# Altium PCB MCU_FOR_DOWNLOAD_V6_8_PCS.PcbDoc (part 4 of 4)
Units mil, origin at the board's own origin, x right, y up, seen from the top; angles counter-clockwise.
Board outline 4834.06 x 3482.15 mil, 4 copper layers (Top, GND1, GND2, Bottom), stack 35.4 mil thick; 280 components, 38 nets, 1144 pads, 944 vias.
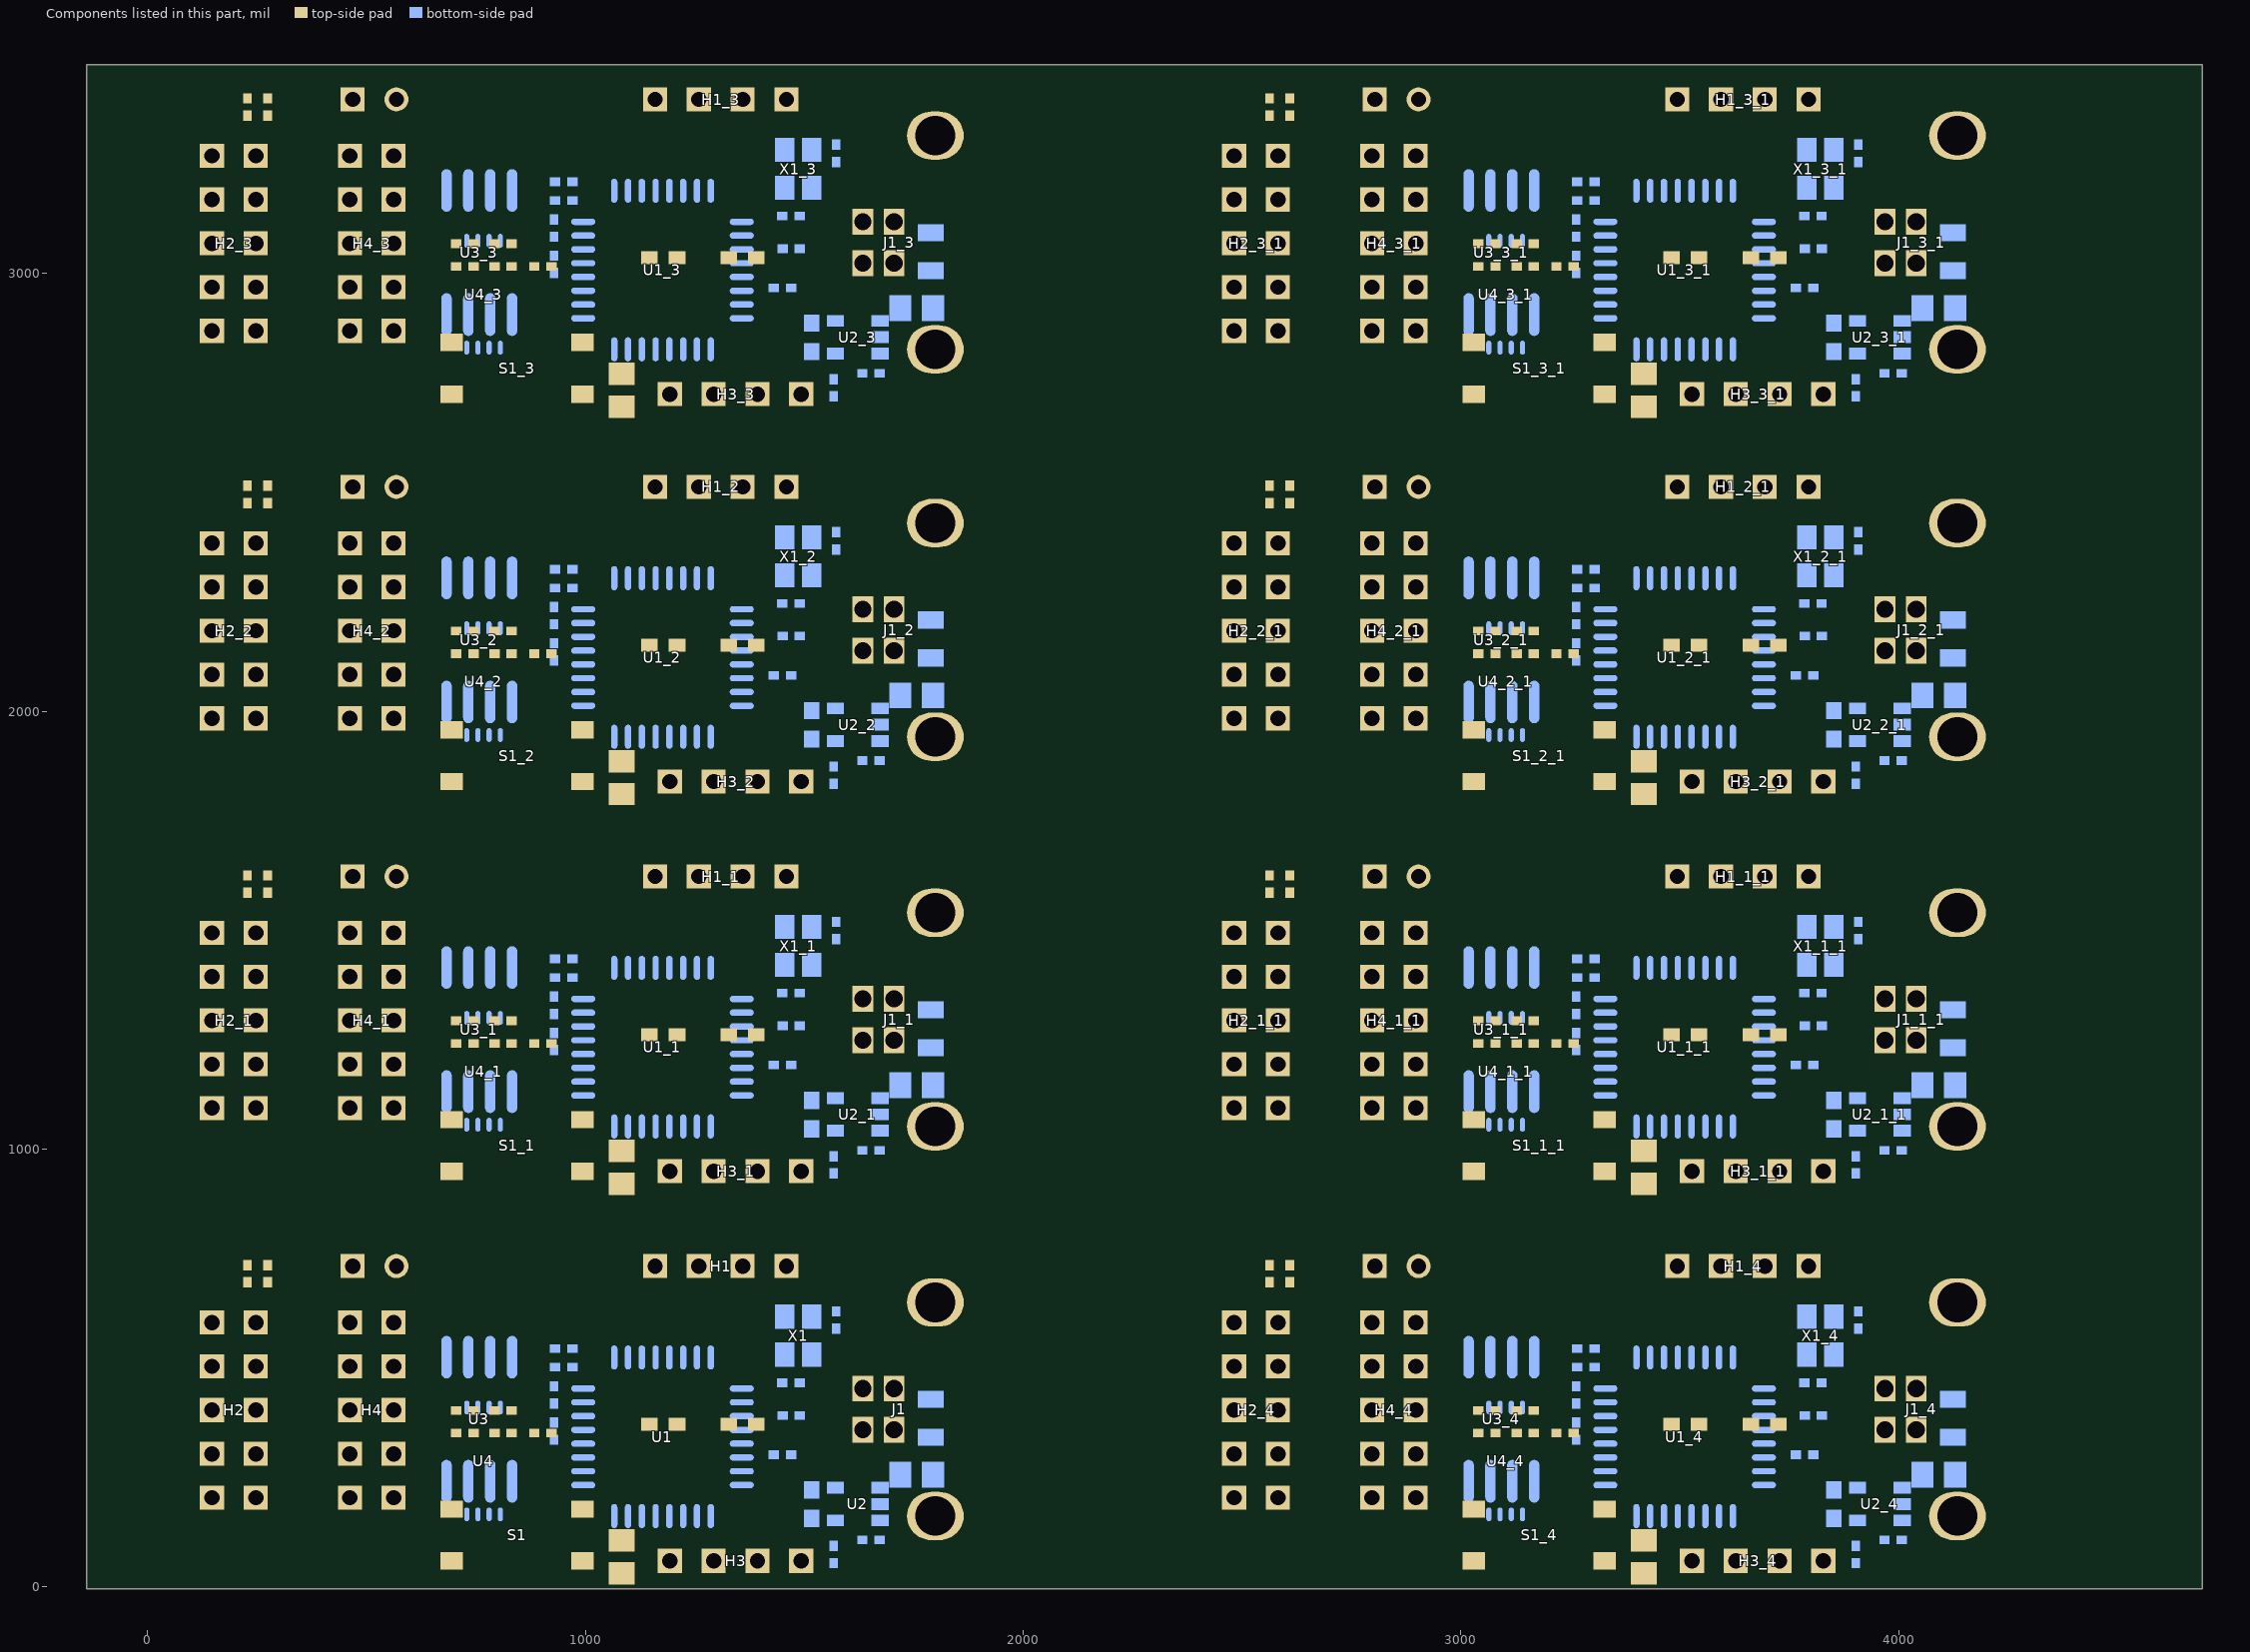
[diagram p4: the components of this part, seen from the top]

## Via types
v1: diameter 16/16/16/16 (per signal layer), hole 8, Top to Bottom, 936 vias
v2: diameter 55/55/55/55 (per signal layer), hole 37, Top to Bottom, 8 vias

## Nets (pads, with @x,y where several pads share a name; then routed paths per layer and width w, separated by ;. In a path a pad name is that pad's centre, name@x,y a point inside that pad or via, vN(x,y) a via of type N, cw(c..) or ccw(c..) an arc to the next point about the centre after c; other vN are vias at no path point) (continued)
copper on no net: (continued)
  other v1: 4058.62,27.17 3401.93,37.4 2968.86,43.31 2422.4,46.85 2628.7,50 2557.83,50.79 3165.71,51.18 2847.2,53.15 3226.73,53.15 2673.19,55.12 2775.16,54.72 2940.51,56.3 2722.8,57.09 4269.25,59.45 2396.81,68.11 3107.83,67.72 4053.5,68.11 4252.32,173.23 4231.46,222.83 3596.81,253.94 2366.5,299.21 2738.54,312.99 4244.45,320.87 3455.08,336.61 2986.97,345.28 2453.11,352.36 2701.54,359.84 2632.24,395.67 2943.27,401.18 3405.87,417.32 3476.73,419.29 3531.85,437.01 3020.04,442.91 4248.39,458.66 2951.14,490.16 2360.2,509.45 2689.33,513.78 3344.84,517.72 4175.55,525.59 3671.61,527.56 3728.31,529.53 3919.65,535.43 4242.48,551.18 3966.89,568.9 4073.19,574.8 3579.09,588.58 3209.02,590.55 2642.09,592.52 3697.2,602.36 3642.09,606.3 3382.24,620.08 3326.34,651.18 2527.91,651.57 3996.42,663.39 2907.83,669.29 2825.16,671.26 3874.37,688.98 2754.29,696.46 2362.56,697.64 2706.26,701.97 2480.67,721.65 2672.4,725.59 3433.82,730.31 2984.61,733.07 3256.26,735.04 3970.83,736.22 4077.13,736.22 4244.45,736.22 4163.74,738.19 2862.56,778.35 3096.81,783.46 3317.28,783.86 3718.86,783.46 4106.65,783.46 3571.22,787.4 1723.62,917.17 4058.62,917.17 1066.93,927.4 3401.93,927.4 633.86,933.31 2968.86,933.31 87.4,936.85 2422.4,936.85 293.7,940 2628.7,940 222.83,940.79 830.71,941.18 2557.83,940.79 3165.71,941.18 512.2,943.15 891.73,943.15 2847.2,943.15 3226.73,943.15 338.19,945.12 440.16,944.72 2673.19,945.12 2775.16,944.72 605.51,946.3 2940.51,946.3 387.8,947.09 2722.8,947.09 1934.25,949.45 4269.25,949.45 61.81,958.11 772.83,957.72 1718.5,958.11 2396.81,958.11 3107.83,957.72 4053.5,958.11 1917.32,1063.23 4252.32,1063.23 1896.46,1112.83 4231.46,1112.83 1261.81,1143.94 3596.81,1143.94 31.5,1189.21 2366.5,1189.21 403.54,1202.99 2738.54,1202.99 1909.45,1210.87 4244.45,1210.87 1120.08,1226.61 3455.08,1226.61 651.97,1235.28 2986.97,1235.28 118.11,1242.36 2453.11,1242.36 366.54,1249.84 2701.54,1249.84 297.24,1285.67 2632.24,1285.67 608.27,1291.18 2943.27,1291.18 1070.87,1307.32 3405.87,1307.32 1141.73,1309.29 3476.73,1309.29 1196.85,1327.01 3531.85,1327.01 685.04,1332.91 3020.04,1332.91 1913.39,1348.66 4248.39,1348.66 616.14,1380.16 2951.14,1380.16 25.2,1399.45 2360.2,1399.45 354.33,1403.78 2689.33,1403.78 1009.84,1407.72 3344.84,1407.72 1840.55,1415.59 4175.55,1415.59 1336.61,1417.56 3671.61,1417.56 1393.31,1419.53 3728.31,1419.53 1584.65,1425.43 3919.65,1425.43 1907.48,1441.18 4242.48,1441.18 1631.89,1458.9 3966.89,1458.9 1738.19,1464.8 4073.19,1464.8 1244.09,1478.58 3579.09,1478.58 874.02,1480.55 3209.02,1480.55 307.09,1482.52 2642.09,1482.52 1362.2,1492.36 3697.2,1492.36 1307.09,1496.3 3642.09,1496.3 1047.24,1510.08 3382.24,1510.08 991.34,1541.18 3326.34,1541.18 192.91,1541.57 2527.91,1541.57 1661.42,1553.39 3996.42,1553.39 572.83,1559.29 2907.83,1559.29 490.16,1561.26 2825.16,1561.26 1539.37,1578.98 3874.37,1578.98 419.29,1586.46 2754.29,1586.46 27.56,1587.64 2362.56,1587.64 371.26,1591.97 2706.26,1591.97 145.67,1611.65 2480.67,1611.65 337.4,1615.59 2672.4,1615.59 1098.82,1620.31 3433.82,1620.31 649.61,1623.07 2984.61,1623.07 921.26,1625.04 3256.26,1625.04 1635.83,1626.22 1742.13,1626.22 1909.45,1626.22 3970.83,1626.22 4077.13,1626.22 4244.45,1626.22 1828.74,1628.19 4163.74,1628.19 527.56,1668.35 2862.56,1668.35 761.81,1673.46 982.28,1673.86 1383.86,1673.46 1771.65,1673.46 3096.81,1673.46 3317.28,1673.86 3718.86,1673.46 4106.65,1673.46 1236.22,1677.4 3571.22,1677.4 1723.62,1807.17 4058.62,1807.17 1066.93,1817.4 3401.93,1817.4 633.86,1823.31 2968.86,1823.31 87.4,1826.85 2422.4,1826.85 293.7,1830 2628.7,1830 222.83,1830.79 830.71,1831.18 2557.83,1830.79 3165.71,1831.18 512.2,1833.15 891.73,1833.15 2847.2,1833.15 3226.73,1833.15 338.19,1835.12 440.16,1834.72 2673.19,1835.12 2775.16,1834.72 605.51,1836.3 2940.51,1836.3 387.8,1837.09 2722.8,1837.09 1934.25,1839.45 4269.25,1839.45 61.81,1848.11 772.83,1847.72 1718.5,1848.11 2396.81,1848.11 3107.83,1847.72 4053.5,1848.11 1917.32,1953.23 4252.32,1953.23 1896.46,2002.83 4231.46,2002.83 1261.81,2033.94 3596.81,2033.94 31.5,2079.21 2366.5,2079.21 403.54,2092.99 2738.54,2092.99 1909.45,2100.87 4244.45,2100.87 1120.08,2116.61 3455.08,2116.61 651.97,2125.28 2986.97,2125.28 118.11,2132.36 2453.11,2132.36 366.54,2139.84 2701.54,2139.84 297.24,2175.67 2632.24,2175.67 608.27,2181.18 2943.27,2181.18 1070.87,2197.32 3405.87,2197.32 1141.73,2199.29 3476.73,2199.29 1196.85,2217.01 3531.85,2217.01 685.04,2222.91 3020.04,2222.91 1913.39,2238.66 4248.39,2238.66 616.14,2270.16 2951.14,2270.16 25.2,2289.45 2360.2,2289.45 354.33,2293.78 2689.33,2293.78 1009.84,2297.72 3344.84,2297.72 1840.55,2305.59 4175.55,2305.59 1336.61,2307.56 3671.61,2307.56 1393.31,2309.53 3728.31,2309.53 1584.65,2315.43 3919.65,2315.43 1907.48,2331.18 4242.48,2331.18 1631.89,2348.9 3966.89,2348.9 1738.19,2354.8 4073.19,2354.8 1244.09,2368.58 3579.09,2368.58 874.02,2370.55 3209.02,2370.55 307.09,2372.52 2642.09,2372.52 1362.2,2382.36 3697.2,2382.36 1307.09,2386.3 3642.09,2386.3 1047.24,2400.08 3382.24,2400.08 991.34,2431.18 3326.34,2431.18 192.91,2431.57 2527.91,2431.57 1661.42,2443.39 3996.42,2443.39 572.83,2449.29 2907.83,2449.29 490.16,2451.26 2825.16,2451.26 1539.37,2468.98 3874.37,2468.98 419.29,2476.46 2754.29,2476.46 27.56,2477.64 2362.56,2477.64 371.26,2481.97 2706.26,2481.97 145.67,2501.65 2480.67,2501.65 337.4,2505.59 2672.4,2505.59 1098.82,2510.31 3433.82,2510.31 649.61,2513.07 2984.61,2513.07 921.26,2515.04 3256.26,2515.04 1635.83,2516.22 1742.13,2516.22 1909.45,2516.22 3970.83,2516.22 4077.13,2516.22 4244.45,2516.22 1828.74,2518.19 4163.74,2518.19 527.56,2558.35 2862.56,2558.35 761.81,2563.46 982.28,2563.86 1383.86,2563.46 1771.65,2563.46 3096.81,2563.46 3317.28,2563.86 3718.86,2563.46 4106.65,2563.46 1236.22,2567.4 3571.22,2567.4 1723.62,2692.17 4058.62,2692.17 1066.93,2702.4 3401.93,2702.4 633.86,2708.31 2968.86,2708.31 87.4,2711.85 2422.4,2711.85 293.7,2715 2628.7,2715 222.83,2715.79 830.71,2716.18 2557.83,2715.79 3165.71,2716.18 512.2,2718.15 891.73,2718.15 2847.2,2718.15 3226.73,2718.15 338.19,2720.12 440.16,2719.72 2673.19,2720.12 2775.16,2719.72 605.51,2721.3 2940.51,2721.3 387.8,2722.09 2722.8,2722.09 1934.25,2724.45 4269.25,2724.45 61.81,2733.11 772.83,2732.72 1718.5,2733.11 2396.81,2733.11 3107.83,2732.72 4053.5,2733.11 1917.32,2838.23 4252.32,2838.23 1896.46,2887.83 4231.46,2887.83 1261.81,2918.94 3596.81,2918.94 31.5,2964.21 2366.5,2964.21 403.54,2977.99 2738.54,2977.99 1909.45,2985.87 4244.45,2985.87 1120.08,3001.61 3455.08,3001.61 651.97,3010.28 2986.97,3010.28 118.11,3017.36 2453.11,3017.36 366.54,3024.84 2701.54,3024.84 297.24,3060.67 2632.24,3060.67 608.27,3066.18 2943.27,3066.18 1070.87,3082.32 3405.87,3082.32 1141.73,3084.29 3476.73,3084.29 1196.85,3102.01 3531.85,3102.01 685.04,3107.91 3020.04,3107.91 1913.39,3123.66 4248.39,3123.66 616.14,3155.16 2951.14,3155.16 25.2,3174.45 2360.2,3174.45 354.33,3178.78 2689.33,3178.78 1009.84,3182.72 3344.84,3182.72 1840.55,3190.59 4175.55,3190.59 1336.61,3192.56 3671.61,3192.56 1393.31,3194.53 3728.31,3194.53 1584.65,3200.43 3919.65,3200.43 1907.48,3216.18 4242.48,3216.18 1631.89,3233.9 3966.89,3233.9 1738.19,3239.8 4073.19,3239.8 1244.09,3253.58 3579.09,3253.58 874.02,3255.55 3209.02,3255.55 307.09,3257.52 2642.09,3257.52 1362.2,3267.36 3697.2,3267.36 1307.09,3271.3 3642.09,3271.3 1047.24,3285.08 3382.24,3285.08 991.34,3316.18 3326.34,3316.18 192.91,3316.57 2527.91,3316.57 1661.42,3328.39 3996.42,3328.39 572.83,3334.29 2907.83,3334.29 490.16,3336.26 2825.16,3336.26 1539.37,3353.98 3874.37,3353.98 419.29,3361.46 2754.29,3361.46 27.56,3362.64 2362.56,3362.64 371.26,3366.97 2706.26,3366.97 145.67,3386.65 2480.67,3386.65 337.4,3390.59 2672.4,3390.59 1098.82,3395.31 3433.82,3395.31 649.61,3398.07 2984.61,3398.07 921.26,3400.04 3256.26,3400.04 1635.83,3401.22 1742.13,3401.22 1909.45,3401.22 3970.83,3401.22 4077.13,3401.22 4244.45,3401.22 1828.74,3403.19 4163.74,3403.19 527.56,3443.35 2862.56,3443.35 761.81,3448.46 982.28,3448.86 1383.86,3448.46 1771.65,3448.46 3096.81,3448.46 3317.28,3448.86 3718.86,3448.46 4106.65,3448.46 1236.22,3452.4 3571.22,3452.4

## Polygon pours and split planes (outlines as drawn)
no net on Top "Top-GGND" (solid, remove dead copper, pour order 17): 2331.85,0 4550,0 4550,818.5 2331.85,818.5
no net on Top "Top-GGND" (solid, remove dead copper, pour order 18): 2331.85,890 4550,890 4550,1708.5 2331.85,1708.5
no net on Top "Top-GGND" (solid, remove dead copper, pour order 19): 2331.85,1780 4550,1780 4550,2598.5 2331.85,2598.5
no net on Top "Top-GGND" (solid, remove dead copper, pour order 20): 2331.85,2665 4550,2665 4550,3483.5 2331.85,3483.5
no net on Top "Top-GGND" (solid, remove dead copper, pour order 21): -3.15,2665 2215,2665 2215,3483.5 -3.15,3483.5
no net on Top "Top-GGND" (solid, remove dead copper, pour order 22): -3.15,1780 2215,1780 2215,2598.5 -3.15,2598.5
no net on Top "Top-GGND" (solid, remove dead copper, pour order 23): -3.15,890 2215,890 2215,1708.5 -3.15,1708.5
GGND on Top "Top-GGND" (solid, remove dead copper, pour order 24): -3.15,0 2215,0 2215,818.5 -3.15,818.5
no net on Bottom "Bottom-GGND" (solid, remove dead copper, pour order 25): 2328.31,0 4545,0 4545,810.24 2328.31,810.24
no net on Bottom "Bottom-GGND" (solid, remove dead copper, pour order 26): 2328.31,890 4545,890 4545,1700.24 2328.31,1700.24
no net on Bottom "Bottom-GGND" (solid, remove dead copper, pour order 27): 2328.31,1780 4545,1780 4545,2590.24 2328.31,2590.24
no net on Bottom "Bottom-GGND" (solid, remove dead copper, pour order 28): 2328.31,2665 4545,2665 4545,3475.24 2328.31,3475.24
no net on Bottom "Bottom-GGND" (solid, remove dead copper, pour order 29): -6.69,2665 2210,2665 2210,3475.24 -6.69,3475.24
no net on Bottom "Bottom-GGND" (solid, remove dead copper, pour order 30): -6.69,1780 2210,1780 2210,2590.24 -6.69,2590.24
no net on Bottom "Bottom-GGND" (solid, remove dead copper, pour order 31): -6.69,890 2210,890 2210,1700.24 -6.69,1700.24
GGND on Bottom "Bottom-GGND" (solid, remove dead copper, pour order 32): -6.69,0 2210,0 2210,810.24 -6.69,810.24

## Keep-outs
Keep-Out Layer:
  lines w10: 0,59.01 ccw(c56.63,56.63) 59.1,0 ; 0,59.01 0,325 -55,325 -135,325 -135,3143.54 -55,3143.54 0,3143.54 0,3413.03 cw(c57.94,3414.14) 59.06,3472.09 2160,3472.09 cw(c2157.3,3410.34) 2219.06,3413.03 2219.06,2724.06 cw(c2159.85,2724.26) 2159.95,2665.05 ; 0,748.03 cw(c57.94,749.14) 59.06,807.09 2160,807.09 cw(c2157.3,745.34) 2219.06,748.03 2219.06,59.06 cw(c2159.85,59.26) 2159.95,0.05 ; 0,750 0,475 -55,475 -55,1218.54 0,1218.54 0,949.01 ; 0,949.01 ccw(c56.63,946.63) 59.1,890 ; 0,1839.01 ccw(c56.63,1836.63) 59.1,1780 ; 0,1839.01 0,2108.54 -55,2108.54 -55,1368.54 0,1368.54 0,1638.03 cw(c57.94,1639.14) 59.06,1697.09 2160,1697.09 cw(c2157.3,1635.34) 2219.06,1638.03 2219.06,949.06 cw(c2159.85,949.26) 2159.95,890.05 ; 0,2724.01 ccw(c56.63,2721.63) 59.1,2665 ; 0,2724.01 0,2993.54 -55,2993.54 -55,2258.54 0,2258.54 0,2528.03 cw(c57.94,2529.14) 59.06,2587.09 2160,2587.09 cw(c2157.3,2525.34) 2219.06,2528.03 2219.06,1839.06 cw(c2159.85,1839.26) 2159.95,1780.05 ; 59.06,0 2160,0 ; 59.06,890 2160,890 ; 59.06,1780 2160,1780 ; 59.06,2665 2160,2665 ; 2335,59.01 ccw(c2391.63,56.63) 2394.1,0 ; 2335,59.06 2335,748.03 cw(c2392.94,749.14) 2394.06,807.09 4495,807.09 cw(c4492.3,745.34) 4554.06,748.03 4554.06,478.54 4609.06,478.54 4609.06,1218.54 4554.06,1218.54 4554.06,949.06 cw(c4494.85,949.26) 4494.95,890.05 ; 2335,949.01 ccw(c2391.63,946.63) 2394.1,890 ; 2335,949.06 2335,1638.03 cw(c2392.94,1639.14) 2394.06,1697.09 4495,1697.09 cw(c4492.3,1635.34) 4554.06,1638.03 4554.06,1368.54 4609.06,1368.54 4609.06,2108.54 4554.06,2108.54 4554.06,1839.06 cw(c4494.85,1839.26) 4494.95,1780.05 ; 2335,1839.01 ccw(c2391.63,1836.63) 2394.1,1780 ; 2335,1839.06 2335,2528.03 cw(c2392.94,2529.14) 2394.06,2587.09 4495,2587.09 cw(c4492.3,2525.34) 4554.06,2528.03 4554.06,2258.54 4609.06,2258.54 4609.06,2993.54 4554.06,2993.54 4554.06,2724.06 cw(c4494.85,2724.26) 4494.95,2665.05 ; 2335,2724.01 ccw(c2391.63,2721.63) 2394.1,2665 ; 2335,2724.06 2335,3413.03 cw(c2392.94,3414.14) 2394.06,3472.09 4495,3472.09 cw(c4492.3,3410.34) 4554.06,3413.03 4554.06,3143.54 4689.06,3143.54 4689.06,328.54 4609.06,328.54 4554.06,328.54 4554.06,59.06 cw(c4494.85,59.26) 4494.95,0.05 ; 2394.06,0 4495,0 ; 2394.06,890 4495,890 ; 2394.06,1780 4495,1780 ; 2394.06,2665 4495,2665

## Silkscreen, mask and mechanical layers (free items; w line width, h text height)
Silkscreen Top:
  drawing of 232 lines, arcs and shapes, not listed
  text "VDD" at 627.95,3411.06 h25.59
  text "VDD" at 2962.95,3411.06 h25.59
  text "VCC" at 330.31,3409.09 h25.59
  text "VCC" at 2665.31,3409.09 h25.59
  text "深圳市集贤科技有限公司" at 1613.78,3407.52 h50
  text "深圳市集贤科技有限公司" at 3948.78,3407.52 h50
  text "1.0" at 1229.53,3281.54 h29.53
  text "0.7" at 1326.38,3281.93 h29.53
  text "1.0" at 3564.53,3281.54 h29.53
  text "0.7" at 3661.38,3281.93 h29.53
  text "1.1" at 1132.28,3280.75 h29.53
  text "0.6" at 1427.95,3280.75 h29.53
  text "1.1" at 3467.28,3280.75 h29.53
  text "0.6" at 3762.95,3280.75 h29.53
  text "WP" at 348.43,3244.92 h25.59 r90
  text "WP" at 2683.43,3244.92 h25.59 r90
  text "CS" at 405.91,3241.38 h25.59 r90
  text "CS" at 2740.91,3241.38 h25.59 r90
  text "CS" at 89.37,3239.02 h25.59 r90
  text "CS" at 2424.37,3239.02 h25.59 r90
  text "WP" at 657.09,3232.72 h25.59 r90
  text "WP" at 2992.09,3232.72 h25.59 r90
  text "HW SPI Jumpers" at 681.89,3213.82 h29.53
  text "HW SPI Jumpers" at 3016.89,3213.82 h29.53
  text "Int:R7=R8=0R" at 704.33,3145.71 h29.53
  text "Int:R7=R8=0R" at 3039.33,3145.71 h29.53
  text "VPP" at 87.8,3139.8 h25.59 r90
  text "VPP" at 2422.8,3139.8 h25.59 r90
  text "VPP" at 412.2,3137.05 h25.59 r90
  text "VPP" at 2747.2,3137.05 h25.59 r90
  text "VCC" at 347.24,3133.11 h25.59 r90
  text "VCC" at 2682.24,3133.11 h25.59 r90
  text "VCC" at 655.91,3120.91 h25.59 r90
  text "VCC" at 2990.91,3120.91 h25.59 r90
  text "GND" at 89.37,3032.72 h25.59 r90
  text "GND" at 2424.37,3032.72 h25.59 r90
  text "GND" at 343.31,3031.54 h25.59 r90
  text "GND" at 2678.31,3031.54 h25.59 r90
  text "GND" at 405.51,3028.78 h25.59 r90
  text "GND" at 2740.51,3028.78 h25.59 r90
  text "GND" at 651.97,3019.33 h25.59 r90
  text "GND" at 2986.97,3019.33 h25.59 r90
  text "P2.4" at 88.58,2929.57 h25.59 r90
  text "P2.4" at 2423.58,2929.57 h25.59 r90
  text "P2.3" at 343.31,2927.2 h25.59 r90
  text "P2.3" at 2678.31,2927.2 h25.59 r90
  text "Ext:R9=R10=R13=0R" at 665.35,2918.15 h25.59
  text "Ext:R9=R10=R13=0R" at 3000.35,2918.15 h25.59
  text "POWER" at 1270.47,2880.75 h39.37
  text "POWER" at 3605.47,2880.75 h39.37
  text "MISO" at 649.21,2823.66 h25.59 r90
  text "MISO" at 2984.21,2823.66 h25.59 r90
  text "MOSI" at 90.55,2819.33 h25.59 r90
  text "MOSI" at 2425.55,2819.33 h25.59 r90
  text "MISO" at 342.52,2817.36 h25.59 r90
  text "MISO" at 2677.52,2817.36 h25.59 r90
  text "MOSI" at 406.69,2815.39 h25.59 r90
  text "MOSI" at 2741.69,2815.39 h25.59 r90
  text "VDD" at 1130.71,2785.47 h29.53
  text "C2D" at 1230.71,2786.26 h29.53
  text "VDD" at 3465.71,2785.47 h29.53
  text "C2D" at 3565.71,2786.26 h29.53
  text "CK" at 1374.41,2783.5 h29.53
  text "GND" at 1445.67,2784.29 h29.53
  text "CK" at 3709.41,2783.5 h29.53
  text "GND" at 3780.67,2784.29 h29.53
  text "SW" at 188.19,2705.16 h49.21 r90
  text "SW" at 2523.19,2705.16 h49.21 r90
  text "HW" at 505.51,2700.43 h49.21 r90
  text "HW" at 2840.51,2700.43 h49.21 r90
  text "SPI" at 269.29,2698.46 h49.21 r90
  text "SPI" at 2604.29,2698.46 h49.21 r90
  text "MCU_FOR_DOWMLOAD_v1.0" at 1627.17,2694.92 h29.53
  text "MCU_FOR_DOWMLOAD_v1.0" at 3962.17,2694.92 h29.53
  text "SPI" at 590.16,2693.74 h49.21 r90
  text "SPI" at 2925.16,2693.74 h49.21 r90
  text "VDD" at 627.95,2526.06 h25.59
  text "VDD" at 2962.95,2526.06 h25.59
  text "VCC" at 330.31,2524.09 h25.59
  text "VCC" at 2665.31,2524.09 h25.59
  text "深圳市集贤科技有限公司" at 1613.78,2522.52 h50
  text "深圳市集贤科技有限公司" at 3948.78,2522.52 h50
  text "1.0" at 1229.53,2396.54 h29.53
  text "0.7" at 1326.38,2396.93 h29.53
  text "1.0" at 3564.53,2396.54 h29.53
  text "0.7" at 3661.38,2396.93 h29.53
  text "1.1" at 1132.28,2395.75 h29.53
  text "0.6" at 1427.95,2395.75 h29.53
  text "1.1" at 3467.28,2395.75 h29.53
  text "0.6" at 3762.95,2395.75 h29.53
  text "WP" at 348.43,2359.92 h25.59 r90
  text "WP" at 2683.43,2359.92 h25.59 r90
  text "CS" at 405.91,2356.38 h25.59 r90
  text "CS" at 2740.91,2356.38 h25.59 r90
  text "CS" at 89.37,2354.02 h25.59 r90
  text "CS" at 2424.37,2354.02 h25.59 r90
  text "WP" at 657.09,2347.72 h25.59 r90
  text "WP" at 2992.09,2347.72 h25.59 r90
  text "HW SPI Jumpers" at 681.89,2328.82 h29.53
  text "HW SPI Jumpers" at 3016.89,2328.82 h29.53
  text "Int:R7=R8=0R" at 704.33,2260.71 h29.53
  text "Int:R7=R8=0R" at 3039.33,2260.71 h29.53
  text "VPP" at 87.8,2254.8 h25.59 r90
  text "VPP" at 2422.8,2254.8 h25.59 r90
  text "VPP" at 412.2,2252.05 h25.59 r90
  text "VPP" at 2747.2,2252.05 h25.59 r90
  text "VCC" at 347.24,2248.11 h25.59 r90
  text "VCC" at 2682.24,2248.11 h25.59 r90
  text "VCC" at 655.91,2235.91 h25.59 r90
  text "VCC" at 2990.91,2235.91 h25.59 r90
  text "GND" at 89.37,2147.72 h25.59 r90
  text "GND" at 2424.37,2147.72 h25.59 r90
  text "GND" at 343.31,2146.54 h25.59 r90
  text "GND" at 2678.31,2146.54 h25.59 r90
  text "GND" at 405.51,2143.78 h25.59 r90
  text "GND" at 2740.51,2143.78 h25.59 r90
  text "GND" at 651.97,2134.33 h25.59 r90
  text "GND" at 2986.97,2134.33 h25.59 r90
  text "P2.4" at 88.58,2044.57 h25.59 r90
  text "P2.4" at 2423.58,2044.57 h25.59 r90
  text "P2.3" at 343.31,2042.2 h25.59 r90
  text "P2.3" at 2678.31,2042.2 h25.59 r90
  text "Ext:R9=R10=R13=0R" at 665.35,2033.15 h25.59
  text "Ext:R9=R10=R13=0R" at 3000.35,2033.15 h25.59
  text "POWER" at 1270.47,1995.75 h39.37
  text "POWER" at 3605.47,1995.75 h39.37
  text "MISO" at 649.21,1938.66 h25.59 r90
  text "MISO" at 2984.21,1938.66 h25.59 r90
  text "MOSI" at 90.55,1934.33 h25.59 r90
  text "MOSI" at 2425.55,1934.33 h25.59 r90
  text "MISO" at 342.52,1932.36 h25.59 r90
  text "MISO" at 2677.52,1932.36 h25.59 r90
  text "MOSI" at 406.69,1930.39 h25.59 r90
  text "MOSI" at 2741.69,1930.39 h25.59 r90
  text "VDD" at 1130.71,1900.47 h29.53
  text "C2D" at 1230.71,1901.26 h29.53
  text "VDD" at 3465.71,1900.47 h29.53
  text "C2D" at 3565.71,1901.26 h29.53
  text "CK" at 1374.41,1898.5 h29.53
  text "GND" at 1445.67,1899.29 h29.53
  text "CK" at 3709.41,1898.5 h29.53
  text "GND" at 3780.67,1899.29 h29.53
  text "SW" at 188.19,1820.16 h49.21 r90
  text "SW" at 2523.19,1820.16 h49.21 r90
  text "HW" at 505.51,1815.43 h49.21 r90
  text "HW" at 2840.51,1815.43 h49.21 r90
  text "SPI" at 269.29,1813.46 h49.21 r90
  text "SPI" at 2604.29,1813.46 h49.21 r90
  text "MCU_FOR_DOWMLOAD_v1.0" at 1627.17,1809.92 h29.53
  text "MCU_FOR_DOWMLOAD_v1.0" at 3962.17,1809.92 h29.53
  text "SPI" at 590.16,1808.74 h49.21 r90
  text "SPI" at 2925.16,1808.74 h49.21 r90
  text "VDD" at 627.95,1636.06 h25.59
  text "VDD" at 2962.95,1636.06 h25.59
  text "VCC" at 330.31,1634.09 h25.59
  text "VCC" at 2665.31,1634.09 h25.59
  text "深圳市集贤科技有限公司" at 1613.78,1632.52 h50
  text "深圳市集贤科技有限公司" at 3948.78,1632.52 h50
  text "1.0" at 1229.53,1506.54 h29.53
  text "0.7" at 1326.38,1506.93 h29.53
  text "1.0" at 3564.53,1506.54 h29.53
  text "0.7" at 3661.38,1506.93 h29.53
  text "1.1" at 1132.28,1505.75 h29.53
  text "0.6" at 1427.95,1505.75 h29.53
  text "1.1" at 3467.28,1505.75 h29.53
  text "0.6" at 3762.95,1505.75 h29.53
  text "WP" at 348.43,1469.92 h25.59 r90
  text "WP" at 2683.43,1469.92 h25.59 r90
  text "CS" at 405.91,1466.38 h25.59 r90
  text "CS" at 2740.91,1466.38 h25.59 r90
  text "CS" at 89.37,1464.02 h25.59 r90
  text "CS" at 2424.37,1464.02 h25.59 r90
  text "WP" at 657.09,1457.72 h25.59 r90
  text "WP" at 2992.09,1457.72 h25.59 r90
  text "HW SPI Jumpers" at 681.89,1438.82 h29.53
  text "HW SPI Jumpers" at 3016.89,1438.82 h29.53
  text "Int:R7=R8=0R" at 704.33,1370.71 h29.53
  text "Int:R7=R8=0R" at 3039.33,1370.71 h29.53
  text "VPP" at 87.8,1364.8 h25.59 r90
  text "VPP" at 2422.8,1364.8 h25.59 r90
  text "VPP" at 412.2,1362.05 h25.59 r90
  text "VPP" at 2747.2,1362.05 h25.59 r90
  text "VCC" at 347.24,1358.11 h25.59 r90
  text "VCC" at 2682.24,1358.11 h25.59 r90
  text "VCC" at 655.91,1345.91 h25.59 r90
  text "VCC" at 2990.91,1345.91 h25.59 r90
  text "GND" at 89.37,1257.72 h25.59 r90
  text "GND" at 2424.37,1257.72 h25.59 r90
  text "GND" at 343.31,1256.54 h25.59 r90
  text "GND" at 2678.31,1256.54 h25.59 r90
  text "GND" at 405.51,1253.78 h25.59 r90
  text "GND" at 2740.51,1253.78 h25.59 r90
  text "GND" at 651.97,1244.33 h25.59 r90
  text "GND" at 2986.97,1244.33 h25.59 r90
  text "P2.4" at 88.58,1154.57 h25.59 r90
  text "P2.4" at 2423.58,1154.57 h25.59 r90
  text "P2.3" at 343.31,1152.2 h25.59 r90
  text "P2.3" at 2678.31,1152.2 h25.59 r90
  text "Ext:R9=R10=R13=0R" at 665.35,1143.15 h25.59
  text "Ext:R9=R10=R13=0R" at 3000.35,1143.15 h25.59
  text "POWER" at 1270.47,1105.75 h39.37
  text "POWER" at 3605.47,1105.75 h39.37
  text "MISO" at 649.21,1048.66 h25.59 r90
  text "MISO" at 2984.21,1048.66 h25.59 r90
  text "MOSI" at 90.55,1044.33 h25.59 r90
  text "MOSI" at 2425.55,1044.33 h25.59 r90
  text "MISO" at 342.52,1042.36 h25.59 r90
  text "MISO" at 2677.52,1042.36 h25.59 r90
  text "MOSI" at 406.69,1040.39 h25.59 r90
  text "MOSI" at 2741.69,1040.39 h25.59 r90
  text "VDD" at 1130.71,1010.47 h29.53
  text "C2D" at 1230.71,1011.26 h29.53
  text "VDD" at 3465.71,1010.47 h29.53
  text "C2D" at 3565.71,1011.26 h29.53
  text "CK" at 1374.41,1008.5 h29.53
  text "GND" at 1445.67,1009.29 h29.53
  text "CK" at 3709.41,1008.5 h29.53
  text "GND" at 3780.67,1009.29 h29.53
  text "SW" at 188.19,930.16 h49.21 r90
  text "SW" at 2523.19,930.16 h49.21 r90
  text "HW" at 505.51,925.43 h49.21 r90
  text "HW" at 2840.51,925.43 h49.21 r90
  text "SPI" at 269.29,923.46 h49.21 r90
  text "SPI" at 2604.29,923.46 h49.21 r90
  text "MCU_FOR_DOWMLOAD_v1.0" at 1627.17,919.92 h29.53
  text "MCU_FOR_DOWMLOAD_v1.0" at 3962.17,919.92 h29.53
  text "SPI" at 590.16,918.74 h49.21 r90
  text "SPI" at 2925.16,918.74 h49.21 r90
  text "VDD" at 627.95,746.06 h25.59
  text "VDD" at 2962.95,746.06 h25.59
  text "VCC" at 330.31,744.09 h25.59
  text "VCC" at 2665.31,744.09 h25.59
  text "深圳市集贤科技有限公司" at 1613.78,742.52 h50
  text "深圳市集贤科技有限公司" at 3948.78,742.52 h50
  text "1.0" at 1229.53,616.54 h29.53
  text "0.7" at 1326.38,616.93 h29.53
  text "1.0" at 3564.53,616.54 h29.53
  text "0.7" at 3661.38,616.93 h29.53
  text "1.1" at 1132.28,615.75 h29.53
  text "0.6" at 1427.95,615.75 h29.53
  text "1.1" at 3467.28,615.75 h29.53
  text "0.6" at 3762.95,615.75 h29.53
  text "WP" at 348.43,579.92 h25.59 r90
  text "WP" at 2683.43,579.92 h25.59 r90
  text "CS" at 405.91,576.38 h25.59 r90
  text "CS" at 2740.91,576.38 h25.59 r90
  text "CS" at 89.37,574.02 h25.59 r90
  text "CS" at 2424.37,574.02 h25.59 r90
  text "WP" at 657.09,567.72 h25.59 r90
  text "WP" at 2992.09,567.72 h25.59 r90
  text "HW SPI Jumpers" at 681.89,548.82 h29.53
  text "HW SPI Jumpers" at 3016.89,548.82 h29.53
  text "Int:R7=R8=0R" at 704.33,480.71 h29.53
  text "Int:R7=R8=0R" at 3039.33,480.71 h29.53
  text "VPP" at 87.8,474.8 h25.59 r90
  text "VPP" at 2422.8,474.8 h25.59 r90
  text "VPP" at 412.2,472.05 h25.59 r90
  text "VPP" at 2747.2,472.05 h25.59 r90
  text "VCC" at 347.24,468.11 h25.59 r90
  text "VCC" at 2682.24,468.11 h25.59 r90
  text "VCC" at 655.91,455.91 h25.59 r90
  text "VCC" at 2990.91,455.91 h25.59 r90
  text "GND" at 89.37,367.72 h25.59 r90
  text "GND" at 2424.37,367.72 h25.59 r90
  text "GND" at 343.31,366.54 h25.59 r90
  text "GND" at 2678.31,366.54 h25.59 r90
  text "GND" at 405.51,363.78 h25.59 r90
  text "GND" at 2740.51,363.78 h25.59 r90
  text "GND" at 651.97,354.33 h25.59 r90
  text "GND" at 2986.97,354.33 h25.59 r90
  text "P2.4" at 88.58,264.57 h25.59 r90
  text "P2.4" at 2423.58,264.57 h25.59 r90
  text "P2.3" at 343.31,262.2 h25.59 r90
  text "P2.3" at 2678.31,262.2 h25.59 r90
  text "Ext:R9=R10=R13=0R" at 665.35,253.15 h25.59
  text "Ext:R9=R10=R13=0R" at 3000.35,253.15 h25.59
  text "POWER" at 1270.47,215.75 h39.37
  text "POWER" at 3605.47,215.75 h39.37
  text "MISO" at 649.21,158.66 h25.59 r90
  text "MISO" at 2984.21,158.66 h25.59 r90
  text "MOSI" at 90.55,154.33 h25.59 r90
  text "MOSI" at 2425.55,154.33 h25.59 r90
  text "MISO" at 342.52,152.36 h25.59 r90
  text "MISO" at 2677.52,152.36 h25.59 r90
  text "MOSI" at 406.69,150.39 h25.59 r90
  text "MOSI" at 2741.69,150.39 h25.59 r90
  text "VDD" at 1130.71,120.47 h29.53
  text "C2D" at 1230.71,121.26 h29.53
  text "VDD" at 3465.71,120.47 h29.53
  text "C2D" at 3565.71,121.26 h29.53
  text "CK" at 1374.41,118.5 h29.53
  text "GND" at 1445.67,119.29 h29.53
  text "CK" at 3709.41,118.5 h29.53
  text "GND" at 3780.67,119.29 h29.53
  text "SW" at 188.19,40.16 h49.21 r90
  text "SW" at 2523.19,40.16 h49.21 r90
  text "HW" at 505.51,35.43 h49.21 r90
  text "HW" at 2840.51,35.43 h49.21 r90
  text "SPI" at 269.29,33.46 h49.21 r90
  text "SPI" at 2604.29,33.46 h49.21 r90
  text "MCU_FOR_DOWMLOAD_v1.0" at 1627.17,29.92 h29.53
  text "MCU_FOR_DOWMLOAD_v1.0" at 3962.17,29.92 h29.53
  text "SPI" at 590.16,28.74 h49.21 r90
  text "SPI" at 2925.16,28.74 h49.21 r90
Silkscreen Bottom:
  lines w11.81: 103.4,156.3 290.7,156.3 290.7,654.72 103.4,654.72 103.4,156.3 ; 103.4,1046.3 103.4,1544.72 290.7,1544.72 290.7,1046.3 103.4,1046.3 ; 103.4,1936.3 103.4,2434.72 290.7,2434.72 290.7,1936.3 103.4,1936.3 ; 103.4,2821.3 103.4,3319.72 290.7,3319.72 290.7,2821.3 103.4,2821.3 ; 416.78,152.76 604.08,152.76 604.08,651.18 416.78,651.18 416.78,152.76 ; 416.78,1042.76 416.78,1541.18 604.08,1541.18 604.08,1042.76 416.78,1042.76 ; 416.78,1932.76 416.78,2431.18 604.08,2431.18 604.08,1932.76 416.78,1932.76 ; 416.78,2817.76 416.78,3316.18 604.08,3316.18 604.08,2817.76 416.78,2817.76 ; 2438.4,156.3 2438.4,654.72 2625.7,654.72 2625.7,156.3 2438.4,156.3 ; 2438.4,1046.3 2625.7,1046.3 2625.7,1544.72 2438.4,1544.72 2438.4,1046.3 ; 2438.4,1936.3 2625.7,1936.3 2625.7,2434.72 2438.4,2434.72 2438.4,1936.3 ; 2438.4,2821.3 2625.7,2821.3 2625.7,3319.72 2438.4,3319.72 2438.4,2821.3 ; 2751.78,152.76 2751.78,651.18 2939.08,651.18 2939.08,152.76 2751.78,152.76 ; 2751.78,1042.76 2939.08,1042.76 2939.08,1541.18 2751.78,1541.18 2751.78,1042.76 ; 2751.78,1932.76 2939.08,1932.76 2939.08,2431.18 2751.78,2431.18 2751.78,1932.76 ; 2751.78,2817.76 2939.08,2817.76 2939.08,3316.18 2751.78,3316.18 2751.78,2817.76
Drill Drawing:
  lines w1: 42.78,-3.1 42.8,-3.1 ; 42.78,886.9 42.8,886.9 ; 42.78,1776.9 42.8,1776.9 ; 42.78,2661.9 42.8,2661.9 ; 2377.78,-3.1 2377.8,-3.1 ; 2377.78,886.9 2377.8,886.9 ; 2377.78,1776.9 2377.8,1776.9 ; 2377.78,2661.9 2377.8,2661.9